# Altium PCB PCB1.PcbDoc
Units mil, origin at the board's own origin, x right, y up, seen from the top; angles counter-clockwise.
Board outline 6000 x 4000 mil, 2 copper layers (Top Layer, Bottom Layer); 24 components, 17 nets, 77 pads, 0 vias.
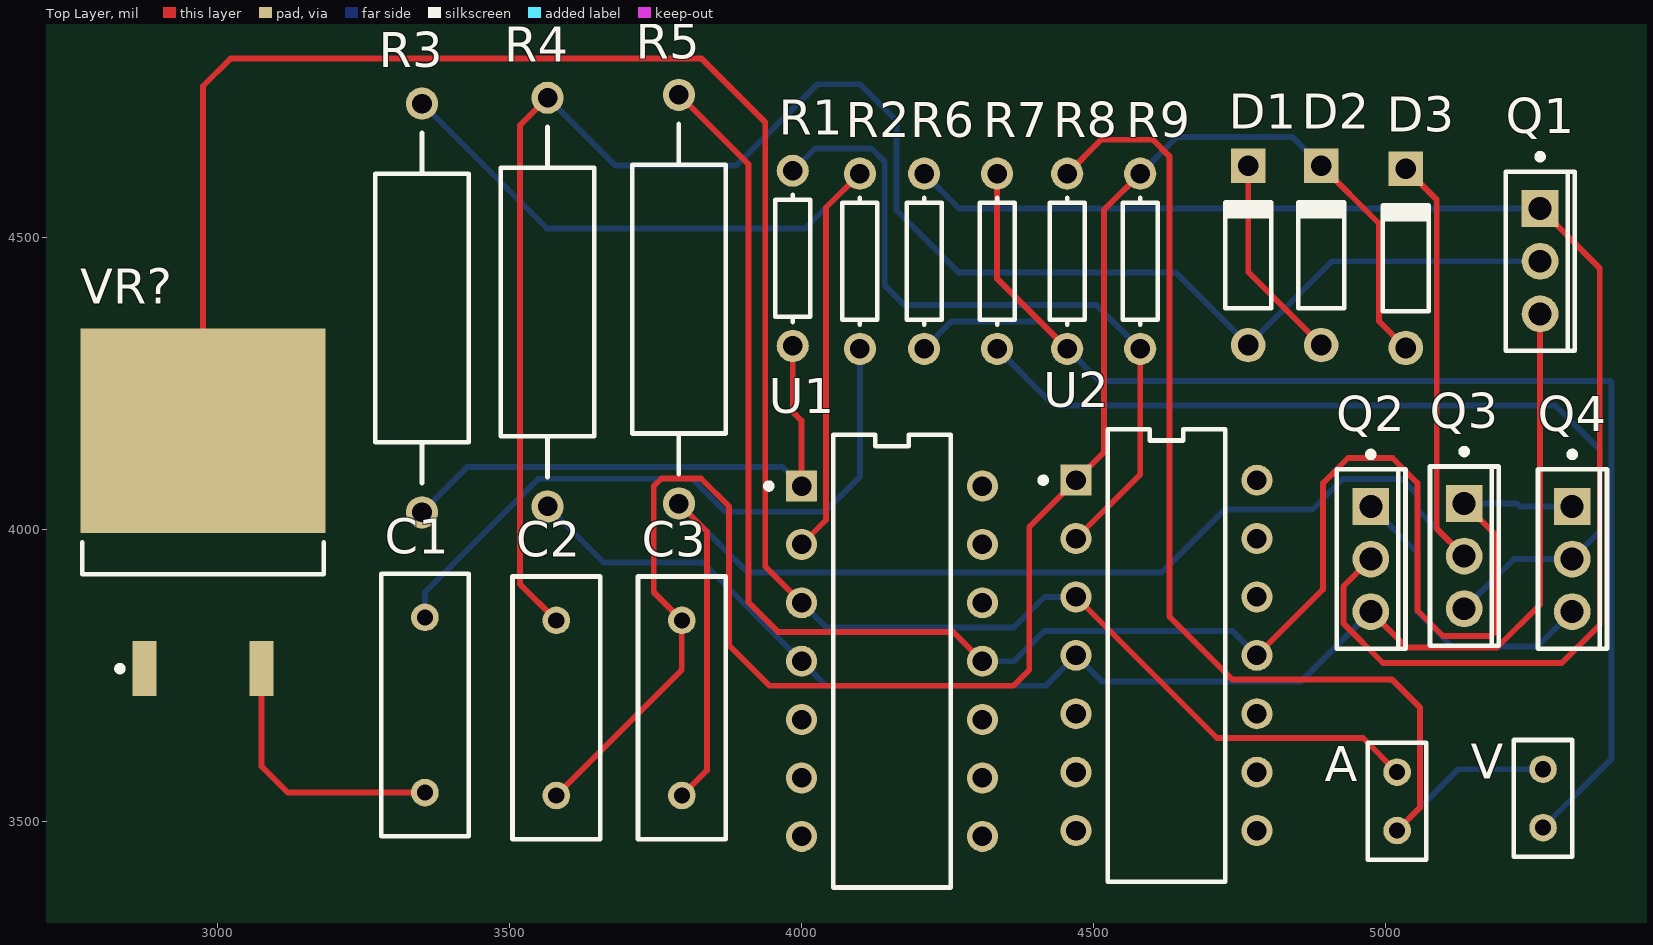
[diagram p0: Top Layer view]
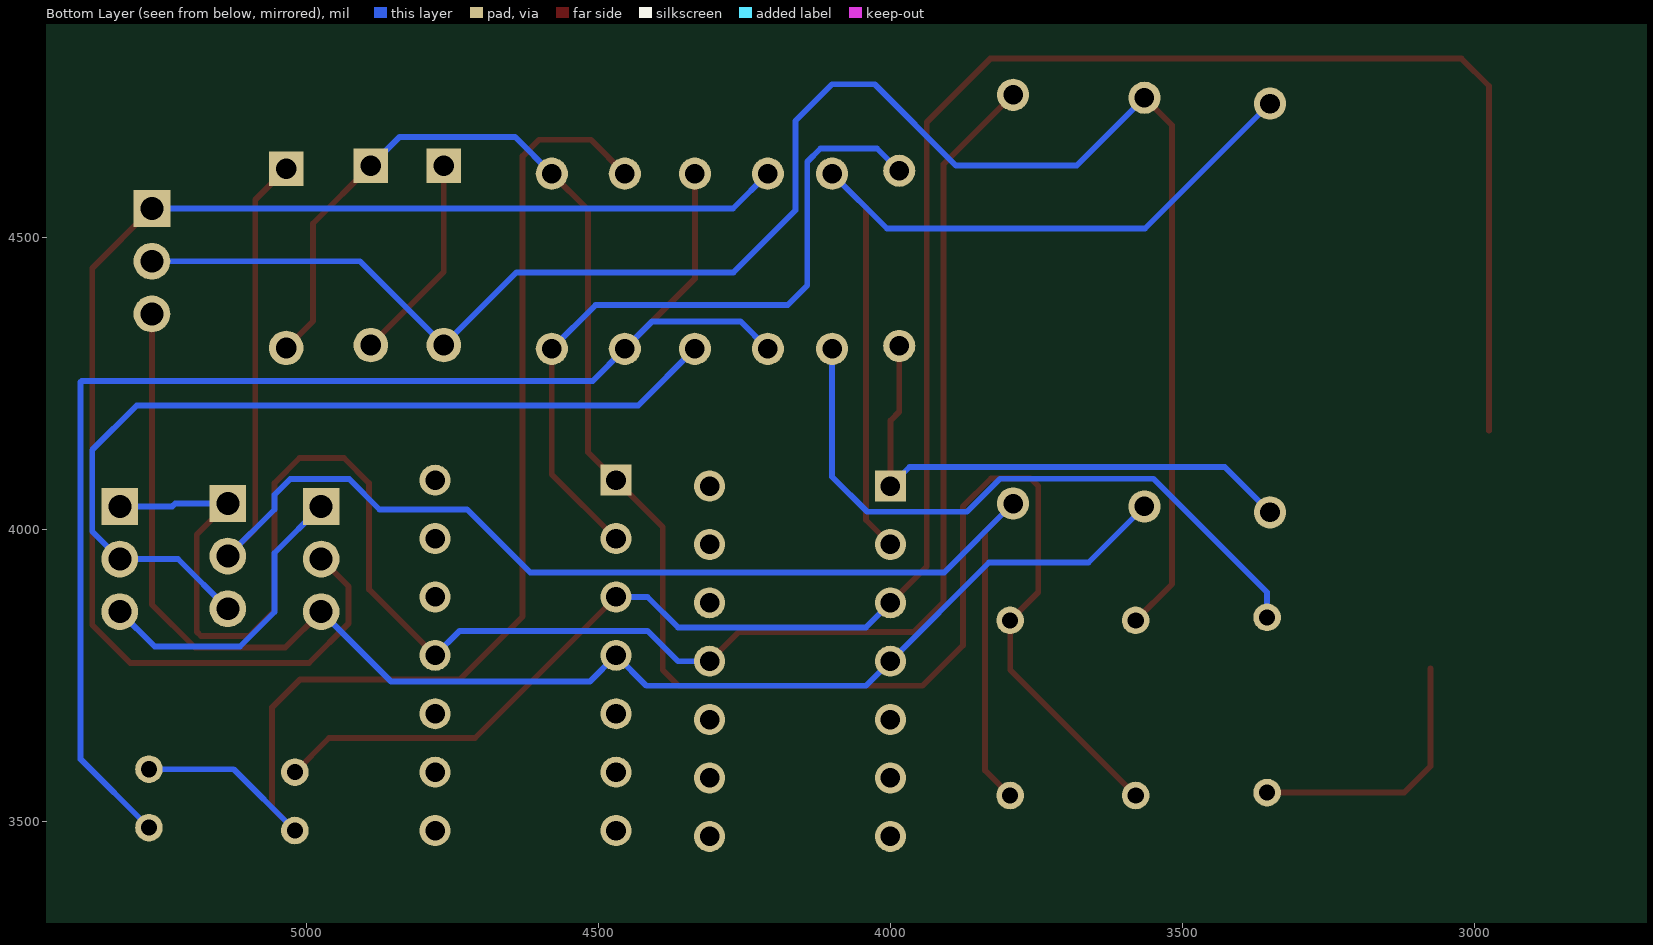
[diagram p1: Bottom Layer view, seen from below]

## Layer stack, top to bottom
Top Solder: solder mask 0.4, Solder Resist, Dk 3.5
Top Layer: signal copper 1.4
Dielectric 1: dielectric 12.6, FR-4, Dk 4.8
Bottom Layer: signal copper 1.4
Bottom Solder: solder mask 0.4, Solder Resist, Dk 3.5

## Board outline
1000,1000 7000,1000 7000,5000 1000,5000

## Design rules (kind name [scope] priority, off if disabled: settings)
Clearance [All] p1: gap=10 ignorepadtopadclearanceinfootprint=FALSE
PolygonConnect [All] p1: connectstyle=Relief reliefconductorwidth=10 reliefentries=4 polygonreliefangle="90 Angle" airgapwidth=10
RoutingVias [All] p1: holewidth=28 width=50 viastyle="Through Hole" minholewidth=28 minwidth=50 maxholewidth=28 maxwidth=50
SolderMaskExpansion [All] p1: expansion=4 istentingtop=FALSE
Width [All] p1: maxlimit=10 minlimit=10 preferedwidth=10
30 further rules are at their usual default settings.

## Components (designator, comment, footprint, x,y, rotation, side; value= is the part's Value field where it differs from the comment)
A "Meter" RAD-0.1 5020,3535 r90 top
C1 "" RAD-0.3 3355,3700 r90 top value=1μF
C2 "Cap" RAD-0.3 3580,3695 r90 top value=0.1μF
C3 "Cap" RAD-0.3 3795,3695 r90 top value=0.1μF
D1 "Diode 1N4149" DO-35A 4765,4470 r90 top
D2 "Diode 1N4149" DO-35A 4890,4470 r90 top
D3 "Diode 1N4149" DO-35A 5035,4465 r90 top
Q1 "BD787G" ONSC-TO-225-3-77-09 5265,4460 r0 top
Q2 "BD787G" ONSC-TO-225-3-77-09 4975,3950 r0 top
Q3 "BD787G" ONSC-TO-225-3-77-09 5135,3955 r0 top
Q4 "BD787G" ONSC-TO-225-3-77-09 5320,3950 r0 top
R1 "Res1" AXIAL-0.3 3985,4465 r90 top value=3kΩ
R2 "" AXIAL-0.3 4100,4460 r90 top value=1kΩ
R3 "Key=C" AXIAL-0.7 3350,4380 r90 top value="10kΩ  50%"
R4 "Key=A" AXIAL-0.7 3565,4390 r90 top value="4.7kΩ  80%"
R5 "Key=B" AXIAL-0.7 3790,4395 r90 top value="4.7kΩ  80%"
R6 "Res1" AXIAL-0.3 4210,4460 r90 top value=560Ω
R7 "Res1" AXIAL-0.3 4335,4460 r90 top value=560Ω
R8 "Res1" AXIAL-0.3 4455,4460 r90 top value=8Ω
R9 "Res1" AXIAL-0.3 4580,4460 r90 top value=3kΩ
U1 "741" FP-N-14-MFG 4155,3775 r0 top
U2 "741" FP-N-14-MFG 4625,3785 r0 top
V "Meter" RAD-0.1 5270,3540 r90 top
VR? "Volt Reg" D2PAK_N 2975,4030 r90 top

## Footprints (in the part's own frame and the unit in brackets; to place one, negate y for a bottom-side part, rotate by r counter-clockwise, add the part's x,y. Pads: shape width x height; smd on the part's side, far side on the other; paste and mask are expansions set on the pad)
AXIAL-0.3 [mm] "Axial Device, Thru-Hole; 2 Leads; 0.3 in Pin Spacing"
  round 1.4 hole 0.85: 1(-3.81,0) 2(3.81,0)
  silkscreen extent -2.77,-0.76 2.77,0.76
AXIAL-0.7 [mm] "Axial Device, Thru-Hole; 2 Leads; 0.7 in Pin Spacing"
  round 1.4 hole 0.85: 1(-8.89,0) 2(8.89,0)
  silkscreen extent -7.62,-2.03 7.62,2.03
D2PAK_N [mm] "D2-PAK, 4-Leads, Body 8.8x10.4mm, Pitch 2.54mm, Lead Span 15.1mm, IPC Medium Density"
  rect 2.4x1.05 smd: 1(-6.8,2.54) 3(-6.8,-2.54)
  rect 8.9x10.65 smd: 2(3.55,0)
  silkscreen extent -6.92,-5.25 -1.3,5.25, body extent -2.7,-5.28 6.3,5.28, height 4.69
DO-35A [mm] "Diode, Axial; Body 4.6 x 1.9 mm (LxDia. max), Lead Dia. 0.53 mm (max)"
  round 1.5 hole 0.9: 1(-3.9,0)
  rect 1.5x1.5 hole 0.9: 2(3.9,0)
  silkscreen extent -2.3,-1 2.4,1
FP-N-14-MFG [mm]
  rect 1.35x1.35 hole 0.85 paste-2539.97 mask+0: 1(-3.935,7.62)
  round 1.35 hole 0.85 paste-2539.97 mask+0: 2(-3.935,5.08) 3(-3.935,2.54) 4(-3.935,0) 5(-3.935,-2.54) 6(-3.935,-5.08) 7(-3.935,-7.62) 8(3.935,-7.62) 9(3.935,-5.08) 10(3.935,-2.54) 11(3.935,0) 12(3.935,2.54) 13(3.935,5.08) 14(3.935,7.62)
  silkscreen extent -5.48,-9.84 2.55,9.84, body extent -4.71,-9.94 4.71,9.94, height 0.25
ONSC-TO-225-3-77-09 [mm] "FM, 3-Leads, Body 7.8x3mm, Pitch 2.29mm"
  rect 1.6x1.6 hole 1: 1(0,2.29)
  round 1.6 hole 1: 2(0,0) 3(0,-2.29)
  silkscreen extent -1.49,-3.9 1.51,4.67, body extent -1.49,-3.9 1.51,3.9, height 13.64
RAD-0.1 [mm] "Radial Cap, Thru-Hole; 2 Leads; 0.1 in Pin Spacing"
  round 1.2 hole 0.7: 1(-1.27,0) 2(1.27,0)
  silkscreen extent -2.54,-1.27 2.54,1.27
RAD-0.3 [mm] "Radial Cap, Thru-Hole; 2 Leads; 0.3 in Pin Spacing"
  round 1.2 hole 0.7: 1(-3.81,0) 2(3.81,0)
  silkscreen extent -5.71,-1.91 5.71,1.91

## Part data
A V: "Indicating Instrument", LatestRevisionDate=17-Jul-2002, LatestRevisionNote="Re-released for DXP Platform.", Note="Place a \"letter\" into the symbol to show the function of the meter or instrument", PackageDescription="Radial Cap, Thru-Hole; 2 Leads; 0.1 in Pin Spacing", PackageReference=RAD-0.1, Published=24-Mar-1999, Publisher="Altium Limited"
C1: library part Cap, "Capacitor", LatestRevisionDate=17-Jul-2002, LatestRevisionNote="Re-released for DXP Platform.", PackageDescription="Radial Cap, Thru-Hole; 2 Leads; 0.3 in Pin Spacing", PackageReference=RAD-0.3, Published=8-Jun-2000, Publisher="Altium Limited"
C2 C3: "Capacitor", LatestRevisionDate=17-Jul-2002, LatestRevisionNote="Re-released for DXP Platform.", PackageDescription="Radial Cap, Thru-Hole; 2 Leads; 0.3 in Pin Spacing", PackageReference=RAD-0.3, Published=8-Jun-2000, Publisher="Altium Limited"
D1 D2 D3: "Computer Diode", Code_JEDEC=DO-204-AH, ComponentLink1Description="Manufacturer Link", ComponentLink1URL=http://www.national.com/, DatasheetVersion=1989, LatestRevisionDate=17-Jul-2002, LatestRevisionNote="Re-released for DXP Platform.", PackageDescription="Diode, Axial; Body 4.6 x 1.9 mm (LxDia. max), Lead Dia. 0.53 mm (max)", PackageReference=DO-35A, PackageVersion=1989, Published=8-Jun-2000, Publisher="Altium Limited"
Q1 Q2 Q3 Q4: library part CMP-013-00034-1, "BD Series 60 V 4 A PNP Complementary Plastic Silicon Power Transistor TO-220 AB", Case/Package=TO-225-3, Frequency=50MHz, Max Operating Temperature=150°C, Min Operating Temperature=-65°C, RoHS Compliant=Yes
R1 R6 R7 R8 R9: "Resistor", LatestRevisionDate=17-Jul-2002, LatestRevisionNote="Re-released for DXP Platform.", PackageDescription="Axial Device, Thru-Hole; 2 Leads; 0.3 in Pin Spacing", PackageReference=AXIAL-0.3, Published=8-Jun-2000, Publisher="Altium Limited"
R2: library part Res1, "Resistor", LatestRevisionDate=17-Jul-2002, LatestRevisionNote="Re-released for DXP Platform.", PackageDescription="Axial Device, Thru-Hole; 2 Leads; 0.3 in Pin Spacing", PackageReference=AXIAL-0.3, Published=8-Jun-2000, Publisher="Altium Limited"
R3 R4 R5: library part "Res Adj1", "Variable Resistor", LatestRevisionDate=17-Jul-2002, LatestRevisionNote="Re-released for DXP Platform.", PackageDescription="Axial Device, Thru-Hole; 2 Leads; 0.7 in Pin Spacing", PackageReference=AXIAL-0.7, Published=8-Jun-2000, Publisher="Altium Limited", Set Position=0.5
U1 U2: library part CMP-09116-000067-1, "IC OPAMP GP 4 CIRCUIT 14DIP", Case/Package=PDIP, Input Bias Current=300nA, Input Offset Voltage (Vos)=500uV, Max Dual Supply Voltage=22V, Max Operating Temperature=70°C, Min Operating Temperature=0°C, Package Quantity=25, Power Supply Rejection Ratio (PSRR)=107.96dB, Voltage Gain=116.26dB, Amplifier Type="GENERAL PURPOSE", Bandwidth=3MHz, Common Mode Rejection Ratio=100dB, Height=3.3mm, Lead Free="Contains Lead", Length=19.05mm, Mount="Through Hole", Number of Amplifiers=4, Number of Channels=4, Number of Circuits=4, Number of Elements=4, Number of Pins=14, Packaging=Rail/Tube, Radiation Hardening=No, REACH SVHC="No SVHC", RoHS Compliant=Yes, Series=-, Slew Rate=1V/µs, Technology=BIPOLAR, Width=6.35mm
VR?: "Voltage Regulator", LatestRevisionDate=29-May-2009, LatestRevisionNote="IPC-7351 Footprint Added.", PackageDescription="3-Pin Transistor Outline Package 2.54 mm Pitch, 15.1 mm Lead Span", PackageReference=D2PAK, Published=24-Mar-1999, Publisher="Altium Limited"

## Nets (pads, with @x,y where several pads share a name; then routed paths per layer and width w, separated by ;. In a path a pad name is that pad's centre, name@x,y a point inside that pad or via, vN(x,y) a via of type N, cw(c..) or ccw(c..) an arc to the next point about the centre after c; other vN are vias at no path point)
-12V: Q3.1 Q4.1 R5.2 U1.11 U2.11 | length 3210.3
  Top Layer w10: R5.2 3909,4626 3909,3876 3960,3825 4259.92,3825 U1.11 ; U2.11 4893,3898.08 4893,4080 4936,4123 5012,4123 5055,4080 5055,3862 5098.65,3818.35 5181,3818.35 5188,3825.35 5188,3992.16 Q3.1
  Bottom Layer w10: U1.11 4364,3775 4416,3827 4737.92,3827 U2.11 ; Q3.1 5225,4045.16 5230,4040.16 Q4.1
GND: A.2 U1.3 U2.3 VR?.2 | length 3649.7
  Top Layer w10: VR?.2 2975,4760 3022,4807 3829,4807 3938,4698 3938,3937.08 U1.3 ; U2.3 4711.65,3643.42 4961.58,3643.42 A.2
  Bottom Layer w10: U1.3 4042.08,3833 4364,3833 4416,3885 U2.3
NetA_1: A.1 R8.2 V.2 | length 2013.2
  Top Layer w10: R8.2 4513,4668 4602,4668 4630,4640 4630,3851.42 4738,3743.42 5011.58,3743.42 5059,3696 5059,3524 A.1
  Bottom Layer w10: A.1 5125,3590 V.2
NetC1_1: C1.1 VR?.3 | length 465.9
  Top Layer w10: VR?.3 3075,3595 3120,3550 C1.1
NetC1_2: C1.2 R2.1 | length 1135.9
  Bottom Layer w10: C1.2 3355,3893 3549.56,4087.56 3812.44,4087.56 3869,4031 4040,4031 4100,4091 R2.1
NetC2_1: C2.1 C3.2 D2.2 D3.1 R9.2 U2.1 | length 3242.4
  Top Layer w10: C2.1 3795,3760 C3.2 3747,3893 3747,4075 3760,4088 3828,4088 3876,4040 3876,3802 3945,3733 4363,3733 4390,3760 4390,4004.92 U2.1 4518,4132.92 4518,4548 R9.2 ; D2.2 4989,4524.54 4989,4357.46 D3.1
  Bottom Layer w10: R9.2 4643,4673 4840.54,4673 D2.2
NetC2_2: C2.2 D1.1 Q1.2 R4.2 | length 3079.8
  Top Layer w10: R4.2 3518,4693 3518,3907 C2.2
  Bottom Layer w10: R4.2 3681,4624 3888,4624 4027,4763 4100,4763 4162.56,4700.44 4162.56,4547.44 4269,4441 4640.46,4441 D1.1 4908.54,4460 Q1.2
NetC3_1: C3.1 D3.2 Q3.2 R5.1 | length 2772.1
  Top Layer w10: R5.1 3838,3997 3838,3588 C3.1 ; D3.2 5088,4565.54 5088,4002 Q3.2
  Bottom Layer w10: R5.1 3908,3927 4617,3927 4725,4035 4875,4035 4927,4087 5028,4087 5055,4060 5055,4035 Q3.2
NetD1_2: D1.2 D2.1 | length 358.9
  Top Layer w10: D1.2 4765,4441.46 D2.1
NetQ1_1: Q1.1 Q2.2 R6.2 | length 2458.8
  Top Layer w10: Q2.2 4928,3903 4928,3840 4996,3772 5302,3772 5367,3837 5367,4448.16 Q1.1
  Bottom Layer w10: R6.2 4269.84,4550.16 Q1.1
NetQ2_1: Q2.1 Q4.3 | length 528.4
  Bottom Layer w10: Q2.1 5055,3960.16 5055,3859.16 5114.16,3800 5260.16,3800 Q4.3
NetQ3_3: Q3.3 Q4.2 R7.1 | length 1530.4
  Bottom Layer w10: R7.1 4432,4213 5291,4213 5367,4137 5367,3997 Q4.2 5220.16,3950 Q3.3
NetR1_1: R1.1 R3.1 U1.1 | length 941.9
  Top Layer w10: R1.1 3985,4202.08 4000.08,4187 U1.1
  Bottom Layer w10: R3.1 3427.56,4107.56 3967.52,4107.56 U1.1
NetR1_2: R1.2 R9.1 U2.2 | length 1247.5
  Top Layer w10: U2.2 4580,4094.92 R9.1
  Bottom Layer w10: R1.2 4023,4653 4120,4653 4142.56,4630.44 4142.56,4418.44 4176,4385 4505,4385 R9.1
NetR2_2: R2.2 R3.2 U1.2 | length 1554
  Top Layer w10: U1.2 4042,4016.92 4042,4552 R2.2
  Bottom Layer w10: R3.2 3564,4516 4006,4516 R2.2
NetR6_1: R6.1 R7.2 R8.1 V.1 | length 2400.7
  Top Layer w10: R7.2 4335,4430 R8.1
  Bottom Layer w10: R6.1 4257,4357 4408,4357 R8.1 4510,4255 5385,4255 5387,4253 5387,3607 V.1
VCC: Q1.3 Q2.3 R4.1 U1.4 U2.4 | length 2470.7
  Top Layer w10: Q2.3 5036.5,3798.35 5191.19,3798.35 5265,3872.16 Q1.3
  Bottom Layer w10: R4.1 3661,3944 3831.08,3944 U1.4 4042.08,3733 4418.08,3733 U2.4 4515.08,3740 4855.16,3740 Q2.3
pads on no net: U1.5 U1.6 U1.7 U1.8 U1.9 U1.10 U1.12 U1.13 U1.14 U2.5 U2.6 U2.7 U2.8 U2.9 U2.10 U2.12 U2.13 U2.14 VR?.1